# EAGLE board megausb (EAGLE 8.4.1)
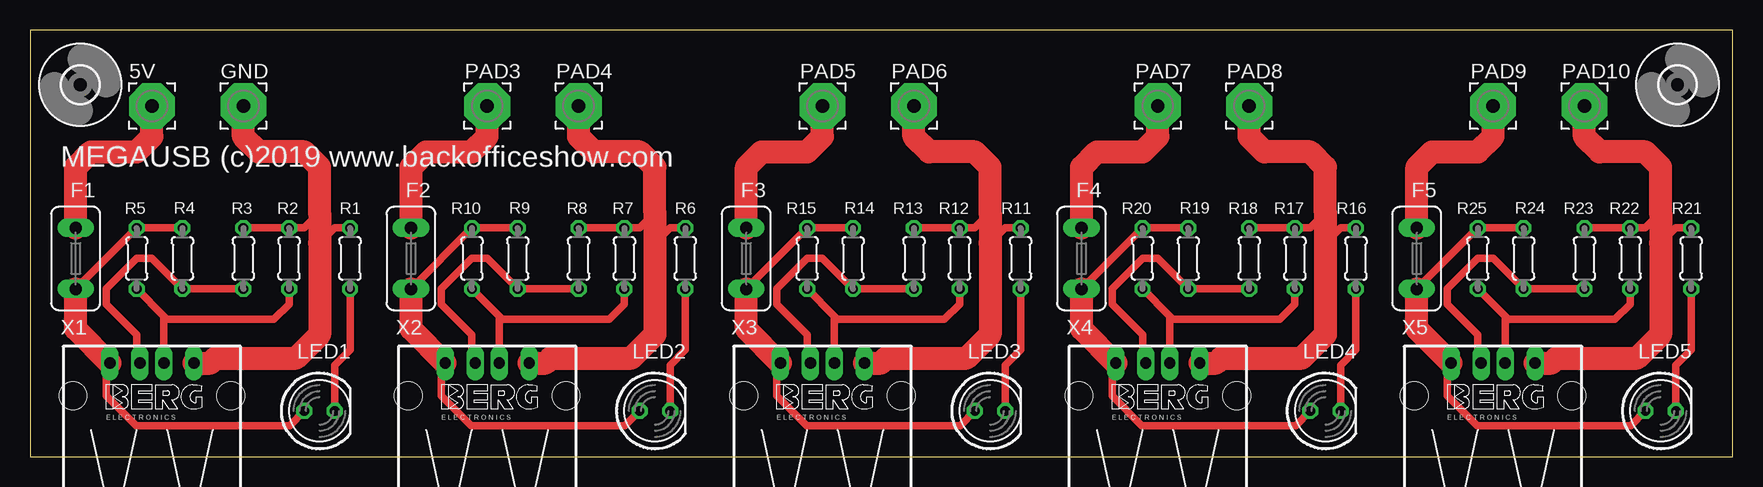
[diagram p0: board, top side]
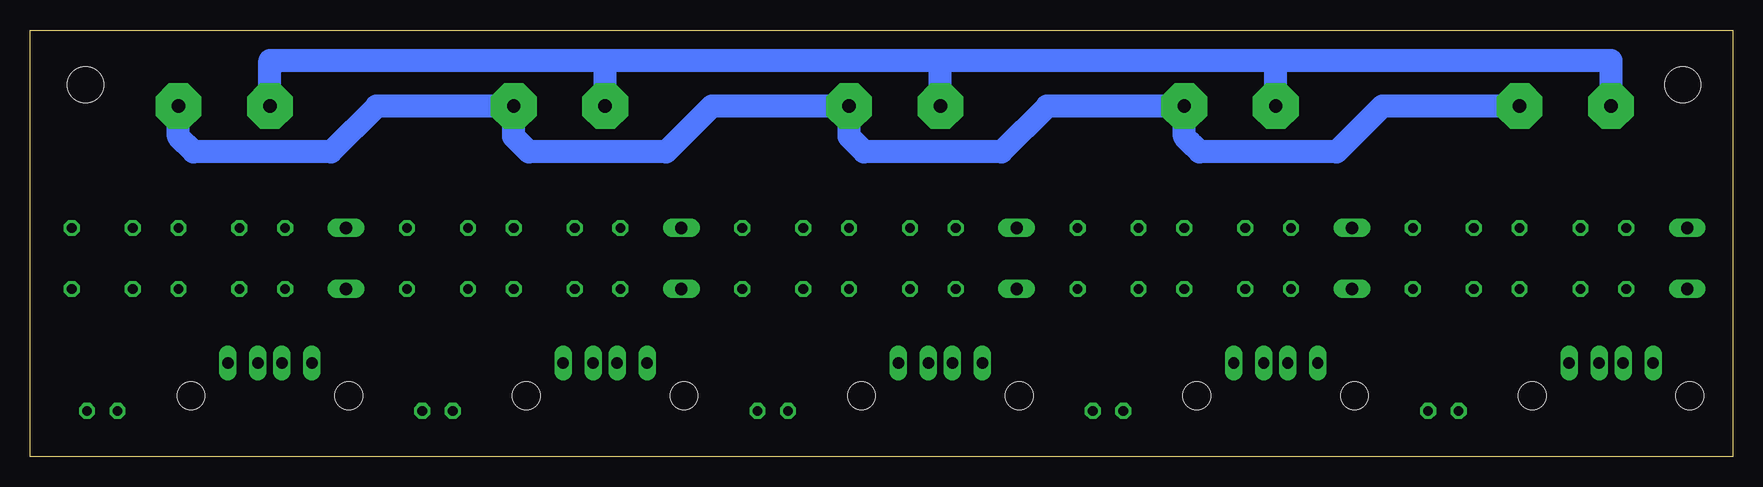
[diagram p1: board, bottom side, seen from below]

Size 141.91 x 35.55 mm. Coordinates in mm from the lower left corner, seen from the top.
Outline: 0,0 141.91,0 141.91,35.55 0,35.55 0,0
Copper layers (1*16): Top 0.035mm / dielectric 1.5mm / Bottom 0.035mm
Design rules "default": minimum track width 6mil, minimum drill 0.35mm, track to track 6mil, track to pad 6mil, pad to pad 6mil, via to via 6mil, smd to smd 6mil, copper to edge 40mil, drill to drill 6mil, minimum pad ring 10mil, minimum via ring 8mil, stop-mask expansion 4mil, vias tented up to drill 0mil, thermal gap 10mil

## Footprints (pad centres in the part's own frame; a part is rotated, then mirrored left to right if it is on the bottom)
3,81/1,1 = drill 1.118 pad 3.81 octagon: 1 0,0
3,0 = hole 3: 0,0
TE5 = drill 1.016 long: 1 -2.54,0; 2 2.54,0
LED5MM = drill 0.813 octagon: A -1.27,0; K 1.27,0
0204/5 = drill 0.813 octagon: 1 -2.54,0; 2 2.54,0
PN87520 = drill 0.95 long: 1 -3.5,2.71; 2 -1,2.71; 3 1,2.71; 4 3.5,2.71 | hole 2.3: -6.57,0; 6.57,0

## Placement (x,y rotation side)
5V  [3,81/1,1]  10.16,29.21 0 top
E$1  [3,0]  4.19,30.99 0 top
E$2  [3,0]  137.29,30.99 0 top
F1  [TE5]  3.81,16.51 90 top
F2  [TE5]  31.75,16.51 90 top
F3  [TE5]  59.69,16.51 90 top
F4  [TE5]  87.63,16.51 90 top
F5  [TE5]  115.57,16.51 90 top
GND  [3,81/1,1]  17.78,29.21 0 top
LED1  [LED5MM]  24.13,3.81 0 top
LED2  [LED5MM]  52.07,3.81 0 top
LED3  [LED5MM]  80.01,3.81 0 top
LED4  [LED5MM]  107.95,3.81 0 top
LED5  [LED5MM]  135.89,3.81 0 top
PAD3  [3,81/1,1]  38.1,29.21 0 top
PAD4  [3,81/1,1]  45.72,29.21 0 top
PAD5  [3,81/1,1]  66.04,29.21 0 top
PAD6  [3,81/1,1]  73.66,29.21 0 top
PAD7  [3,81/1,1]  93.98,29.21 0 top
PAD8  [3,81/1,1]  101.6,29.21 0 top
PAD9  [3,81/1,1]  121.92,29.21 0 top
PAD10  [3,81/1,1]  129.54,29.21 0 top
R1  330R  [0204/5]  26.67,16.51 90 top
R2  20k  [0204/5]  21.59,16.51 90 top
R3  20k  [0204/5]  17.78,16.51 90 top
R4  300k  [0204/5]  12.7,16.51 270 top
R5  300k  [0204/5]  8.89,16.51 90 top
R6  330R  [0204/5]  54.61,16.51 90 top
R7  20k  [0204/5]  49.53,16.51 90 top
R8  20k  [0204/5]  45.72,16.51 90 top
R9  300k  [0204/5]  40.64,16.51 270 top
R10  300k  [0204/5]  36.83,16.51 90 top
R11  330R  [0204/5]  82.55,16.51 90 top
R12  20k  [0204/5]  77.47,16.51 90 top
R13  20k  [0204/5]  73.66,16.51 90 top
R14  300k  [0204/5]  68.58,16.51 270 top
R15  300k  [0204/5]  64.77,16.51 90 top
R16  330R  [0204/5]  110.49,16.51 90 top
R17  20k  [0204/5]  105.41,16.51 90 top
R18  20k  [0204/5]  101.6,16.51 90 top
R19  300k  [0204/5]  96.52,16.51 270 top
R20  300k  [0204/5]  92.71,16.51 90 top
R21  330R  [0204/5]  138.43,16.51 90 top
R22  20k  [0204/5]  133.35,16.51 90 top
R23  20k  [0204/5]  129.54,16.51 90 top
R24  300k  [0204/5]  124.46,16.51 270 top
R25  300k  [0204/5]  120.65,16.51 90 top
X1  [PN87520]  10.16,5.08 0 top
X2  [PN87520]  38.1,5.08 0 top
X3  [PN87520]  66.04,5.08 0 top
X4  [PN87520]  93.98,5.08 0 top
X5  [PN87520]  121.92,5.08 0 top

## Library data of the parts
5V GND PAD3-PAD10 = wirepad
E$1 E$2 = holes
F1-F5 = fuse; OC_FARNELL: unknown; OC_NEWARK: unknown
LED1-LED5 = led
R1-R25 = rcl
X1-X5 = con-berg; OC_FARNELL: unknown; OC_NEWARK: unknown

## Nets
5V: 5V.1 F1.2 F2.2 F3.2 F4.2 F5.2 PAD3.1 PAD5.1 PAD7.1 PAD9.1
D+: R2.1 R5.1 X1.3
D+1: R7.1 R10.1 X2.3
D+2: R12.1 R15.1 X3.3
D+3: R17.1 R20.1 X4.3
D+4: R22.1 R25.1 X5.3
D-: R3.1 R4.2 X1.2
D-1: R8.1 R9.2 X2.2
D-2: R13.1 R14.2 X3.2
D-3: R18.1 R19.2 X4.2
D-4: R23.1 R24.2 X5.2
F1-5V: F1.1 LED1.A R4.1 R5.2 X1.1
F1-5V1: F2.1 LED2.A R9.1 R10.2 X2.1
F1-5V2: F3.1 LED3.A R14.1 R15.2 X3.1
F1-5V3: F4.1 LED4.A R19.1 R20.2 X4.1
F1-5V4: F5.1 LED5.A R24.1 R25.2 X5.1
GND: GND.1 PAD4.1 PAD6.1 PAD8.1 PAD10.1 R1.2 R2.2 R3.2 R6.2 R7.2 R8.2 R11.2 R12.2 R13.2 R16.2 R17.2 R18.2 R21.2 R22.2 R23.2 X1.4 X2.4 X3.4 X4.4 X5.4
N$1: LED1.K R1.1
N$2: LED2.K R6.1
N$3: LED3.K R11.1
N$4: LED4.K R16.1
N$5: LED5.K R21.1

## Tracks (layer width: path | path; a pad name or v marks a point on that pad's centre or on a via)
5V
  Top 1.905: F1.2 3.81,24.13 5.08,25.4 8.89,25.4 10.16,26.67 5V.1 | F2.2 31.75,24.13 33.02,25.4 36.83,25.4 38.1,26.67 PAD3.1 | F3.2 59.69,24.13 60.96,25.4 64.77,25.4 66.04,26.67 PAD5.1 | F4.2 87.63,24.13 88.9,25.4 92.71,25.4 93.98,26.67 PAD7.1 | F5.2 115.57,24.13 116.84,25.4 120.65,25.4 121.92,26.67 PAD9.1
  Bottom 1.905: 5V.1 10.16,33.02 38.1,33.02 | 66.04,33.02 38.1,33.02 | 93.98,33.02 66.04,33.02 | 121.92,33.02 93.98,33.02 | 121.92,33.02 121.92,32.22 | PAD3.1 38.1,33.02 | PAD5.1 66.04,33.02 | PAD7.1 93.98,33.02 | PAD9.1 121.92,33.02
D+
  Top 0.61: 11.16,11.7 R5.1 | 11.16,11.7 X1.3 | R2.1 21.59,12.7 20.32,11.43 11.43,11.43 11.16,11.7
D+1
  Top 0.61: 39.1,11.7 R10.1 | 39.1,11.7 X2.3 | R7.1 49.53,12.7 48.26,11.43 39.37,11.43 39.1,11.7
D+2
  Top 0.61: 67.04,11.7 R15.1 | 67.04,11.7 X3.3 | R12.1 77.47,12.7 76.2,11.43 67.31,11.43 67.04,11.7
D+3
  Top 0.61: 94.98,11.7 R20.1 | 94.98,11.7 X4.3 | R17.1 105.41,12.7 104.14,11.43 95.25,11.43 94.98,11.7
D+4
  Top 0.61: 122.92,11.7 R25.1 | 122.92,11.7 X5.3 | R22.1 133.35,12.7 132.08,11.43 123.19,11.43 122.92,11.7
D-
  Top 0.61: X1.2 8.89,8.06 8.89,10.16 6.35,12.7 6.35,13.97 8.89,16.51 10.16,16.51 R4.2 R3.1
D-1
  Top 0.61: X2.2 36.83,8.06 36.83,10.16 34.29,12.7 34.29,13.97 36.83,16.51 38.1,16.51 R9.2 R8.1
D-2
  Top 0.61: X3.2 64.77,8.06 64.77,10.16 62.23,12.7 62.23,13.97 64.77,16.51 66.04,16.51 R14.2 R13.1
D-3
  Top 0.61: X4.2 92.71,8.06 92.71,10.16 90.17,12.7 90.17,13.97 92.71,16.51 93.98,16.51 R19.2 R18.1
D-4
  Top 0.61: X5.2 120.65,8.06 120.65,10.16 118.11,12.7 118.11,13.97 120.65,16.51 121.92,16.51 R24.2 R23.1
F1-5V
  Top 0.61: F1.1 R5.2 R4.1 | X1.1 6.35,7.48 6.35,5.08 8.84,2.59 21.64,2.59 LED1.A
  Top 1.905: X1.1 3.81,10.64 F1.1
F1-5V1
  Top 0.61: F2.1 R10.2 R9.1 | X2.1 34.29,7.48 34.29,5.08 36.78,2.59 49.58,2.59 LED2.A
  Top 1.905: X2.1 31.75,10.64 F2.1
F1-5V2
  Top 0.61: F3.1 R15.2 R14.1 | X3.1 62.23,7.48 62.23,5.08 64.72,2.59 77.52,2.59 LED3.A
  Top 1.905: X3.1 59.69,10.64 F3.1
F1-5V3
  Top 0.61: F4.1 R20.2 R19.1 | X4.1 90.17,7.48 90.17,5.08 92.66,2.59 105.46,2.59 LED4.A
  Top 1.905: X4.1 87.63,10.64 F4.1
F1-5V4
  Top 0.61: F5.1 R25.2 R24.1 | X5.1 118.11,7.48 118.11,5.08 120.6,2.59 133.4,2.59 LED5.A
  Top 1.905: X5.1 115.57,10.64 F5.1
GND
  Top 0.61: R3.2 R2.2 22.86,19.05 24.13,20.32 | R1.2 25.4,19.05 24.13,17.78 | R8.2 R7.2 50.8,19.05 52.07,20.32 | R6.2 53.34,19.05 52.07,17.78 | R13.2 R12.2 78.74,19.05 80.01,20.32 | R11.2 81.28,19.05 80.01,17.78 | R18.2 R17.2 106.68,19.05 107.95,20.32 | R16.2 109.22,19.05 107.95,17.78 | R23.2 R22.2 134.62,19.05 135.89,20.32 | R21.2 137.16,19.05 135.89,17.78
  Top 1.905: X1.4 15.03,7.79 15.44,8.2 22.17,8.2 24.13,10.16 24.13,17.78 24.13,20.32 24.13,24.13 22.86,25.4 19.05,25.4 17.78,26.67 GND.1 | X2.4 42.97,7.79 43.38,8.2 50.11,8.2 52.07,10.16 52.07,17.78 52.07,20.32 52.07,24.13 50.8,25.4 46.99,25.4 45.72,26.67 PAD4.1 | X3.4 70.91,7.79 71.32,8.2 78.05,8.2 80.01,10.16 80.01,17.78 80.01,20.32 80.01,24.13 78.74,25.4 74.93,25.4 73.66,26.67 PAD6.1 | X4.4 98.85,7.79 99.26,8.2 105.99,8.2 107.95,10.16 107.95,17.78 107.95,20.32 107.95,24.13 106.68,25.4 102.87,25.4 101.6,26.67 PAD8.1 | X5.4 126.79,7.79 127.2,8.2 133.93,8.2 135.89,10.16 135.89,17.78 135.89,20.32 135.89,24.13 134.62,25.4 130.81,25.4 129.54,26.67 PAD10.1
  Bottom 1.905: GND.1 29.21,29.21 33.02,25.4 44.45,25.4 | 44.45,25.4 45.25,26.2 | 72.39,25.4 60.96,25.4 57.15,29.21 PAD4.1 45.72,26.67 44.45,25.4 | 72.39,25.4 73.19,26.2 | PAD10.1 129.54,26.67 128.27,25.4 116.84,25.4 113.03,29.21 PAD8.1 101.6,26.67 100.33,25.4 88.9,25.4 85.09,29.21 PAD6.1 73.66,26.67 72.39,25.4
N$1
  Top 0.61: R1.1 26.67,8.89 25.4,7.62 LED1.K
N$2
  Top 0.61: R6.1 54.61,8.89 53.34,7.62 LED2.K
N$3
  Top 0.61: R11.1 82.55,8.89 81.28,7.62 LED3.K
N$4
  Top 0.61: R16.1 110.49,8.89 109.22,7.62 LED4.K
N$5
  Top 0.61: R21.1 138.43,8.89 137.16,7.62 LED5.K

## Text on the board
tPlace: MEGAUSB (c)2019 www.backofficeshow.com